# Altium PCB TAUV-Killswitch.PcbDoc
Units mil, origin at the board's own origin, x right, y up, seen from the top; angles counter-clockwise.
Board outline 1170 x 960 mil, 2 copper layers (Top Layer, Bottom Layer); 18 components, 9 nets, 41 pads, 6 vias.
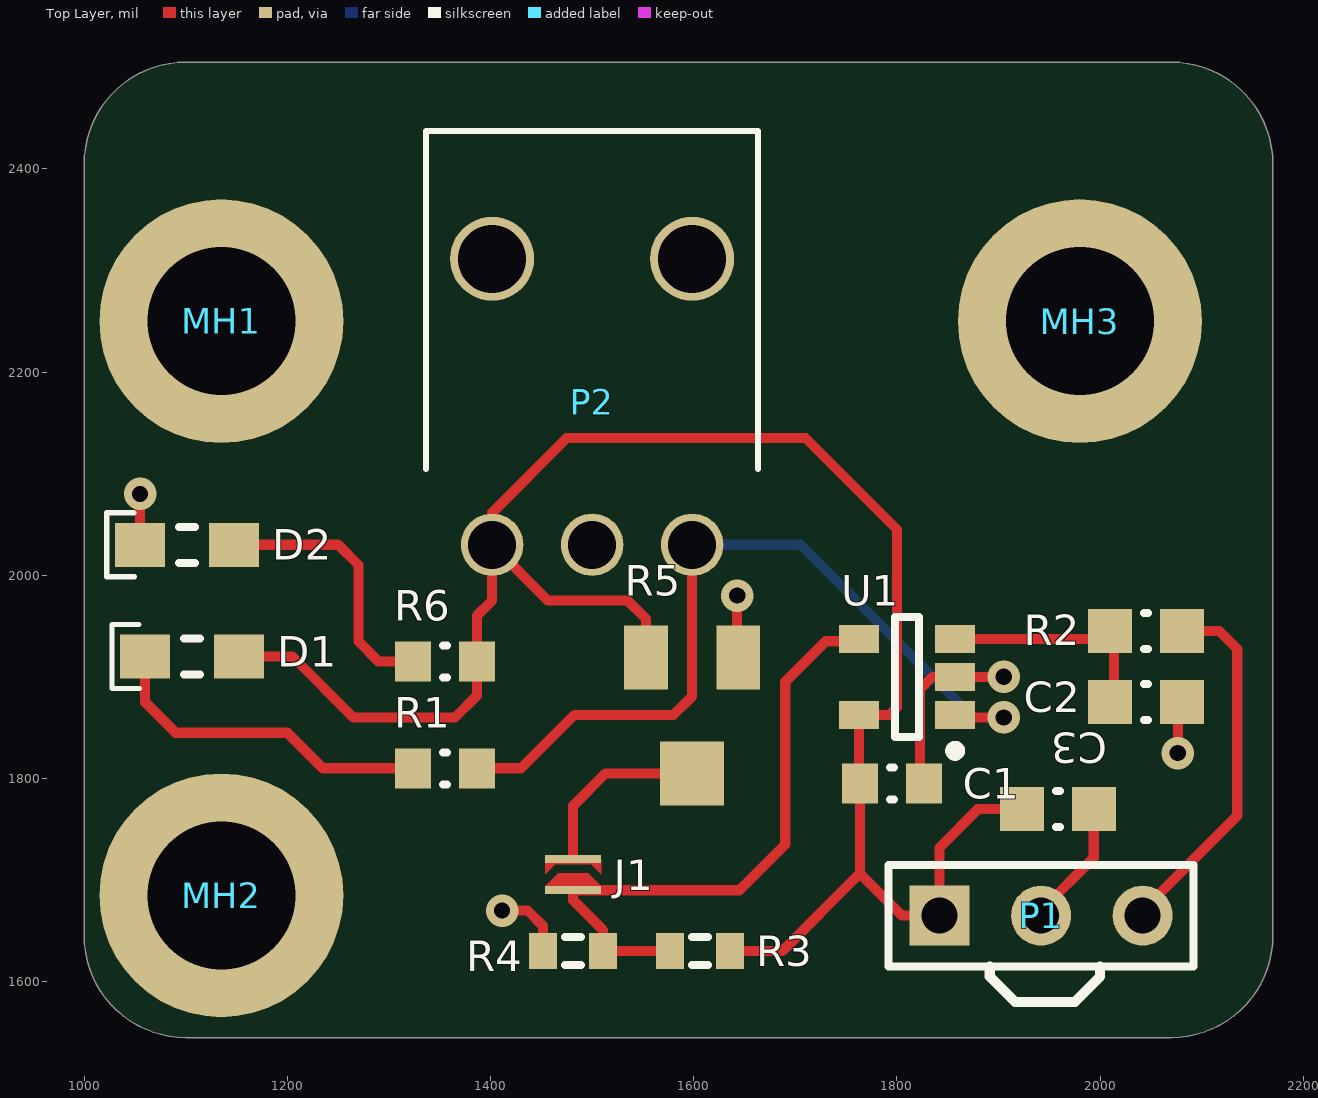
[diagram p0: Top Layer view]
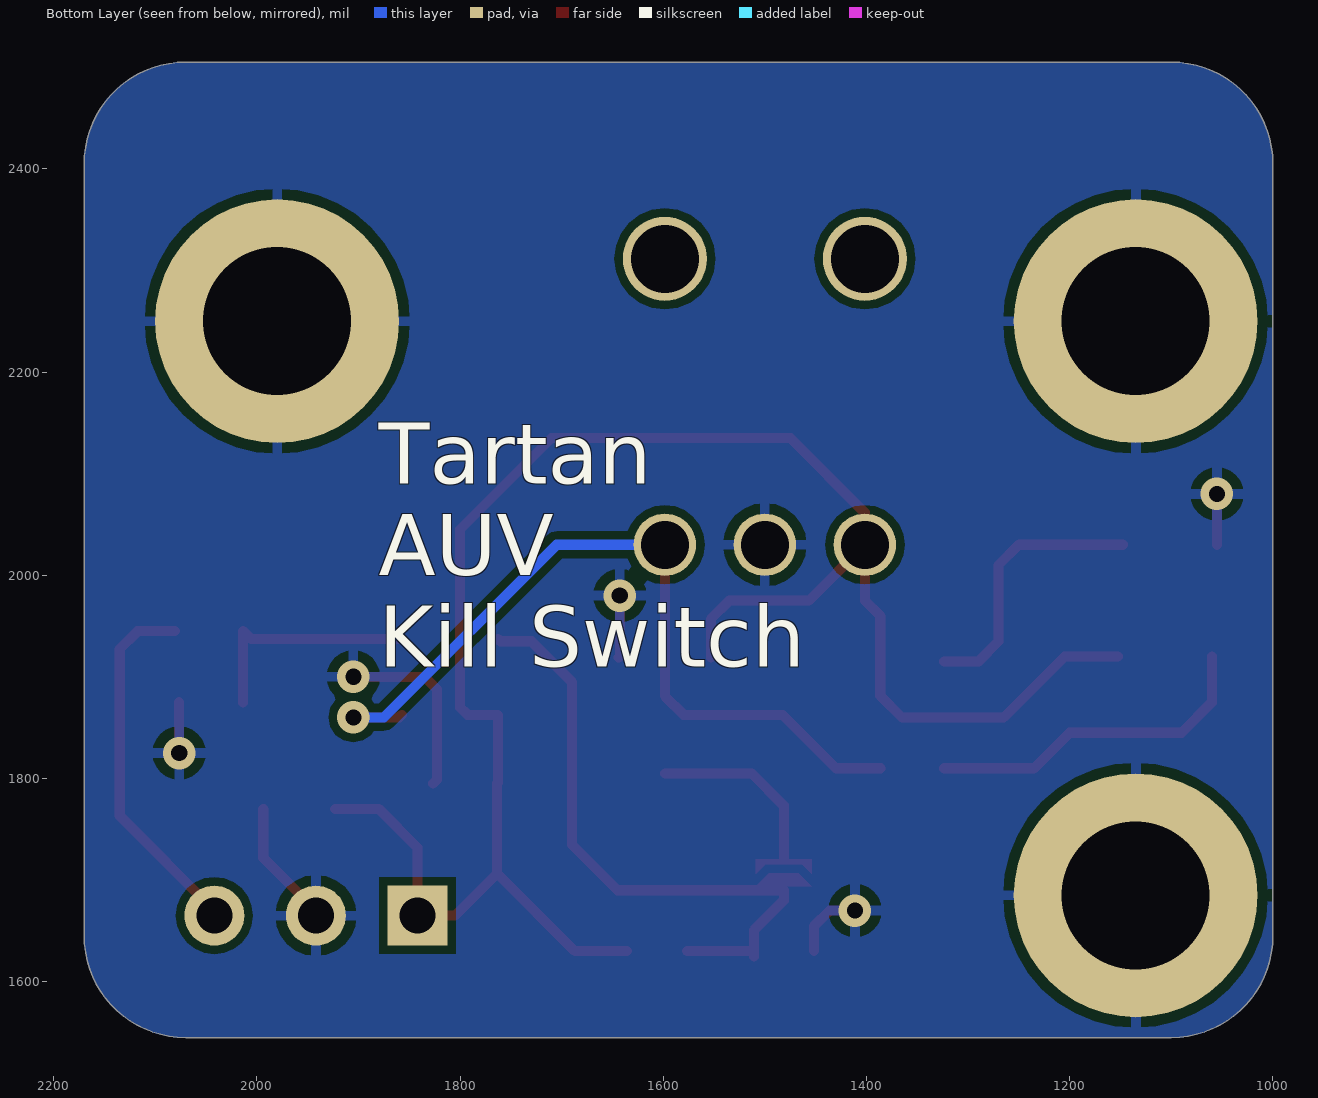
[diagram p1: Bottom Layer view, seen from below]

## Layer stack, top to bottom
Top Solder: solder mask 0.4, Solder Resist, Dk 3.5
Top Layer: signal copper 1.4
Dielectric 1: dielectric 12.6, FR-4, Dk 4.8
Bottom Layer: signal copper 1.4
Bottom Solder: solder mask 0.4, Solder Resist, Dk 3.5

## Board outline
1100,1545 2070,1545 ccw(c2070,1645) 2170,1645 2170,2405 ccw(c2070,2405) 2070,2505 1100,2505 ccw(c1100,2405) 1000,2405 1000,1645 ccw(c1100,1645)

## Design rules (kind name [scope] priority, off if disabled: settings)
Clearance [All] p1: gap=8 ignorepadtopadclearanceinfootprint=FALSE
PolygonConnect [All] p1: connectstyle=Relief reliefconductorwidth=10 reliefentries=4 polygonreliefangle="90 Angle" airgapwidth=10
RoutingVias [All] p1: holewidth=16 width=32 viastyle="Through Hole" minholewidth=16 minwidth=32 maxholewidth=28 maxwidth=50
SolderMaskExpansion [All] p1: expansion=4
Width [All] p1: maxlimit=10 minlimit=10 preferedwidth=10
30 further rules are at their usual default settings.

## Classes and differential pairs
component class U_Hall_Effect: C1 C2 D1 J1 R1 R2 R3 R4 U1
component class Main: C3 D2 MH1 MH2 MH3 P1 P2 R6

## Components (designator, comment, footprint, x,y, rotation, side; value= is the part's Value field where it differs from the comment)
C1 "100nF" CAPC0603(1608)100_N 1795,1795 r0 top
C2 "CAP 150nF 50V 0603(1608)" CAPC0603(1608)100_M 2045,1875 r180 top value=150nF
C3 "CAP 150nF 50V 0603(1608)" CAPC0603(1608)100_M 1958.31,1770 r0 top value=150nF
D1 "LED RED" LED_0805 1106.26,1920 r0 top
D2 "LED GREEN" LED_0805 1101.26,2030 r0 top
J1 "(Closed)" "Solder Jumper - Closed" 1481.3,1720.51 r270 top
MH1 "#4-40" "Mounting Hole #4-40" 1135,2250 r0 top
MH2 "#4-40" "Mounting Hole #4-40" 1135,1685 r0 top
MH3 "#4-40" "Mounting Hole #4-40" 1980,2250 r0 top
P1 "Header 3" HDR1X3 1841.85,1665 r0 top
P2 "3-Pin Molex Nano-Fit" "MOLEX NANO-FIT 1X3" 1598.43,2030 r180 top
R1 "100R" RESC0603(1608)_N 1355,1810 r0 top value="100.00 Ohm"
R2 "11K 1% 0603(1608)" RESC0603(1608)_M 2045,1945 r180 top value="11000.00 Ohm"
R3 "Res3" J1-0603 1606.31,1630 r180 top value=DNP
R4 "Res3" J1-0603 1481.31,1630 r180 top value=DNP
R5 "22AR100KLFTR" "TT BI 22A TRIM POT" 1598.43,1919.17 r180 top value=100k
R6 "100R" RESC0603(1608)_N 1355,1915 r0 top value="100.00 Ohm"
U1 "TS391SN2T1G" ONSC-TSOP-5-483-02_V 1810,1900 r180 top

## Footprints (in the part's own frame and the unit in brackets; to place one, negate y for a bottom-side part, rotate by r counter-clockwise, add the part's x,y. Pads: shape width x height; smd on the part's side, far side on the other; paste and mask are expansions set on the pad)
CAPC0603(1608)100_M [mm] "Chip Capacitor, Body 1.6x0.8mm, Height 1.0mm, IPC Low Density"
  rect 1.1x1.1 smd: 1(-0.9,0) 2(0.9,0)
  silkscreen extent -0.05,-0.45 0.05,0.45, body extent -0.87,-0.47 0.88,0.48, height 1
CAPC0603(1608)100_N [mm] "Chip Capacitor, Body 1.6x0.8mm, Height 1.0mm, IPC Medium Density"
  rect 0.9x1 smd: 1(-0.8,0) 2(0.8,0)
  silkscreen extent -0.05,-0.4 0.05,0.4, body extent -0.87,-0.48 0.88,0.47, height 1
HDR1X3 [mm] "Connector; Header; 3 Position"
  rect 1.5x1.5 hole 0.9: 1(0,0)
  round 1.5 hole 0.9: 2(2.54,0) 3(5.08,0)
  silkscreen extent -1.27,-1.27 6.35,1.27
J1-0603 [mm] "Chip Resistor, Body 1.6x0.8mm, IPC High Density"
  rect 0.7x0.9 smd: 1(-0.75,0) 2(0.75,0)
  silkscreen extent -0.2,-0.35 0.2,0.35, body extent -0.85,-0.48 0.85,0.48, height 0.9
LED_0805 [mm] "Liteon 0805 Chip LED"
  rect 1.25x1.1 smd: 1(-1.175,0) 2(1.175,0)
  silkscreen extent -2.01,-0.8 0.2,0.8, body extent -1,-0.63 1,0.63, height 0.8
"MOLEX NANO-FIT 1X3" [mm]
  round 1.56 hole 1.2: 1(0,0) 2(2.5,0) 3(5,0)
  round 2.1 hole 1.7: ""(0,-7.15) ""(5,-7.15)
  silkscreen extent -1.65,-10.35 6.65,-1.9, body extent -2.6,-26.11 10.97,0.32, height 7.56
"Mounting Hole #4-40" [mm] "Mounting Hole for ANSI #4-40 w/ Flat Washer, Loose Fit"
  round 6.1 hole 3.7: 0(0,0)
ONSC-TSOP-5-483-02_V [mm] "SOP, 5-Leads, Body 3x1.5mm, Pitch 0.95mm"
  rect 1x0.7 smd: 1(-1.2,0.95) 2(-1.2,0) 3(-1.2,-0.95) 4(1.2,-0.95) 5(1.2,0.95)
  silkscreen extent -1.33,-1.5 0.3,1.97, body extent -0.75,-1.5 0.75,1.5, height 1.1
RESC0603(1608)_M [mm] "Chip Resistor, Body 1.6x0.8mm, IPC Low Density"
  rect 1.1x1.1 smd: 1(-0.9,0) 2(0.9,0)
  silkscreen extent -0.05,-0.45 0.05,0.45, body extent -0.85,-0.47 0.85,0.47, height 0.6
RESC0603(1608)_N [mm] "Chip Resistor, Body 1.6x0.8mm, IPC Medium Density"
  rect 0.9x1 smd: 1(-0.8,0) 2(0.8,0)
  silkscreen extent -0.05,-0.4 0.05,0.4, body extent -0.85,-0.47 0.85,0.47, height 0.6
"Solder Jumper - Closed" [mm]
  rect 0.2x1.4 smd paste+0: 1(0,0) 2(0.775,0)
  Top Layer region: 0.375,-0.7 0,-0.7 0,0.7 0.375,0.7 0.125,0.45 0.125,-0.45
  Top Layer region: 0.35,0.375 0.675,0.7 0.675,-0.7 0.35,-0.375
"TT BI 22A TRIM POT" [mm] "Model 22A (22AR100KLFTR)"
  rect 1.09x1.6 smd: 1(1.155,0) 3(-1.155,0)
  rect 1.6x1.6 smd: 2(0,2.9)
  body extent -1.6,-0.38 1.6,3.13, height 2.22

## Part data
C1: library part CMP-1035-02580-1, "CAP 100nF 10V ±10% 0603 (1608 Metric) Thickness 1mm SMD", Case-EIA=0603, Case-Metric=1608, Rated Voltage="10 V", Tolerance=±10%, Max Thickness="1 mm", Technology=SMT
C2 C3: library part CMP-1035-02624-1, "CAP 150nF 50V -20% to +80% 0603 (1608 Metric) Thickness 1mm SMD", Case-EIA=0603, Case-Metric=1608, Rated Voltage="50 V", Tolerance="-20% to +80%", Max Thickness="1 mm", Technology=SMT
D1: library part LED0, "led", Color=Red, Current - Test=20mA, Lens Color=Colorless, Manufacturer="Lite-On Inc.", Manufacturer Part Number=LTST-C171KRKT, Millicandela Rating=54mcd, Package / Case="0805 (2012 Metric)", Supplier Part Number 1=160-1427-1-ND, Voltage - Forward (Vf) (Typ)=2V, Category=Optoelectronics, ComponentLink1Description=http://optoelectronics.liteon.com/upload/download/DS22-2000-109/LTST-C171KRKT.pdf, ComponentLink1URL=http://optoelectronics.liteon.com/upload/download/DS22-2000-109/LTST-C171KRKT.pdf, Features=-, Height (Max)=0.80mm, Lens Style/Size="Rectangle with Flat Top, 1.40mm x 1.25mm", Lens Transparency=Clear, Mounting Type="Surface Mount", Packaging="Cut Tape (CT)", Part Status=Active, Pricing 1="1=0.31, 10=0.225, 25=0.1656, 100=0.1183, 250=0.0804, 500=0.07096, 1000=0.05558 (USD)", RoHS="RoHS Compliant", Size / Dimension="2.00mm L x 1.25mm W", Stock 1=260544, Supplier 1=Digi-Key, Viewing Angle=130°, Wavelength - Dominant=631nm, Wavelength - Peak=639nm
D2: library part LED0, "led", Color=Green, Current - Test=20mA, Lens Color=Colorless, Manufacturer="Lite-On Inc.", Manufacturer Part Number=LTST-C171KGKT, Millicandela Rating=35mcd, Package / Case="0805 (2012 Metric)", Supplier Part Number 1=160-1426-1-ND, Voltage - Forward (Vf) (Typ)=2V, Category=Optoelectronics, ComponentLink1Description=http://optoelectronics.liteon.com/upload/download/DS22-2000-118/LTST-C171KGKT.pdf, ComponentLink1URL=http://optoelectronics.liteon.com/upload/download/DS22-2000-118/LTST-C171KGKT.pdf, Features=-, Height (Max)=0.90mm, Lens Style/Size="Rectangle with Flat Top, 1.40mm x 1.25mm", Lens Transparency=Clear, Mounting Type="Surface Mount", Packaging="Cut Tape (CT)", Part Status=Active, Pricing 1="1=0.31, 10=0.225, 25=0.1656, 100=0.1183, 250=0.0804, 500=0.07096, 1000=0.05558 (USD)", RoHS="RoHS Compliant", Size / Dimension="2.00mm L x 1.25mm W", Stock 1=350441, Supplier 1=Digi-Key, Viewing Angle=130°, Wavelength - Dominant=571nm, Wavelength - Peak=574nm
J1: library part "Jumper Closed", "Jumper"
MH1 MH2 MH3: library part "Mounting Hole #4-40, Loose Fit", "Mounting Hole for ANSI #4-40 w/ Flat Washer, Loose Fit", Datasheet=http://blogs.mentor.com/tom-hausherr/blog/tag/pcb-mounting-holes/
P1: "Header, 3-Pin", LatestRevisionDate=17-Jul-2002, LatestRevisionNote="Re-released for DXP Platform.", Publisher="Altium Limited"
P2: library part "3-Pin Nano-Fit", "NanoFit RA Hdr TH SR 3Ckt", Manufacturer=Molex, Part Number=105313-1204, Supplier Part Number=538-105313-1204, Supplier=Mouser
R1 R6: library part CMP-1012-00050-1, "100R 0.1W 5% 0603 (1608 Metric)  SMD", Case-EIA=0603, Case-Metric=1608, Power="0.1 W", Tolerance="5 %", Technology=SMT
R2: library part CMP-1012-00627-1, "11K 0.1W 1% 0603 (1608 Metric)  SMD", Case-EIA=0603, Case-Metric=1608, Power="0.1 W", Tolerance="1 %", Technology=SMT
R3 R4: "Resistor", LatestRevisionDate=29-May-2009, LatestRevisionNote="IPC-7351 Footprint Added.", PackageDescription="Chip Resistor", PackageReference=J1-0603, Published=8-Jun-2000, Publisher="Altium Limited"
R5: library part "TT 22AR Trim Pot", "TT Electronics BI 22AR100KLFTR SMT trim pot, 100k 20%", Supplier Part Number 1=987-1003-1-ND, Tolerance=20%, Datasheet=http://www.bitechnologies.com/pdfs/22.pdf, Supplier 1=Digi-Key
U1: library part CMP-1305-00060-1, "Low Power Single Voltage Comparator, 2 to 36 V, -40 to 125 degC, 5-Pin TSOP, Pb-Free, Tape and Reel", Manufacturer="On Semiconductor", ComponentLink1Description="Manufacturer URL", ComponentLink1URL=http://www.onsemi.com/, ComponentLink2Description=Datasheet, ComponentLink2URL=http://www.onsemi.com/pub_link/Collateral/TS391-D.PDF, ComponentLink3Description="Package Specification", ComponentLink3URL=http://www.onsemi.com/pub_link/Collateral/483.PDF, DatasheetVersion="Rev. 3", ICC Typ (mA)=0.5, IO Typ (mA)=16, Mounting Technology="Surface Mount", PackageDescription="5-Pin Small Outline Package, Body 3 x 1.5 mm, Pitch 0.95 mm", PackageReference=TSOP-5-483-02, PackageVersion="Rev. K, 04/2013", Packing="Tape and Reel", PartNumber=TS391SN2T1G, RoHS=TRUE, VCC Max (V)=36, VCC Min (V)=2

## Via types
v1: diameter 32, hole 16, Top Layer to Bottom Layer, 6 vias

## Nets (pads, with @x,y where several pads share a name; then routed paths per layer and width w, separated by ;. In a path a pad name is that pad's centre, name@x,y a point inside that pad or via, vN(x,y) a via of type N, cw(c..) or ccw(c..) an arc to the next point about the centre after c; other vN are vias at no path point)
ESTOP_N: P2.1 R1.2 U1.1 | length 816.1
  Top Layer w10: R1.2 1430,1810 1482.6,1862.6 1580,1862.6 1598.43,1881.02 P2.1 ; U1.1 1859.84,1860 v1(1905,1860)
  Bottom Layer w10: P2.1 1705,2030 1875,1860 v1(1905,1860)
GND: C1.2 C2.1 C3.2 D2.1 MH1.0 MH2.0 MH3.0 P1.2 P2.2 R4.2 R5.3 U1.2 | length 536
  Top Layer w10: D2.1 v1(1055,2080) ; v1(1411.31,1670) 1436.31,1670 1451.78,1654.53 R4.2 ; v1(1642.71,1980) 1642.71,1920.36 R5.3 ; C1.2 1822.56,1798.94 1822.56,1887.56 1835,1900 U1.2 v1(1905,1900) ; P1.2@1941.85,1670 1993.75,1721.9 C3.2 ; v1(2076.5,1825) C2.1@2076.5,1875
HALL_SIG: P1.3 R2.1 | length 357.8
  Top Layer w10: P1.3@2041.85,1670 2135,1763.15 2135,1927.4 2117.4,1945 R2.1
NetC2_2: C2.2 R2.2 U1.3 | length 229.4
  Top Layer w10: U1.3 2005.91,1937.4 2013.5,1945 C2.2@2013.5,1875
NetD1_1: D1.1 R1.1 | length 335.4
  Top Layer w10: D1.1 1060,1875 1090,1845 1200,1845 1235,1810 R1.1
NetD2_2: D2.2 R6.1 | length 267.6
  Top Layer w10: D2.2 1250,2030 1270,2010 1270,1935 1290,1915 R6.1
NetJ1_1: J1.1 R5.2 | length 182.9
  Top Layer w10: J1.1 1481.3,1773.11 1513.19,1805 R5.2
NetJ1_2: J1.2 R3.2 R4.1 U1.4 | length 620.8
  Top Layer w10: R4.1@1510.83,1625 R4.1 ; R3.2 R4.1 ; U1.4 1760.35,1935 1730,1935 1690,1895 1690,1735 1645,1690 J1.2 1481.31,1680 1510.83,1650.47 R4.1
VCC_3V3: C1.1 C3.1 D1.2 P1.1 P2.3 R3.1 R5.1 R6.2 U1.5 | length 1929.9
  Top Layer w10: D1.2 1205,1920 1265,1860 1365,1860 1386.5,1881.5 R6.2 1386.5,1960 1401.57,1975.08 P2.3 ; R5.1 1552.95,1957.05 1535,1975 1456.57,1975 P2.3 ; R3.1 1687.01,1630 1763.5,1706.5 ; C3.1 1880,1770 1841.85,1731.85 P1.1 1805,1665 1763.5,1706.5 ; P2.3 1401.57,2061.57 1475,2135 1710,2135 1800,2045 1800,1870 1792.6,1862.6 U1.5 1762.76,1795.75 C1.1 1763.5,1706.5
pads on no net: P2.

## Polygon pours and split planes (outlines as drawn)
GND on Bottom Layer "Bottom Layer-GND" (solid, pour order 0): 1000,2405 1000,1645 ccw(c1100,1645) 1100,1545 2070,1545 ccw(c2070,1645) 2170,1645 2170,2405 ccw(c2070,2405) 2070,2505 1100,2505 ccw(c1100,2405)

## Silkscreen, mask and mechanical layers (free items; w line width, h text height)
Top Overlay:
  lines w10: 1891.34,1615 1891.34,1605 1916.34,1580 1975,1580 2000,1605 2000,1615
Bottom Overlay:
  text "Tartan / AUV / Kill Switch" at 1880,1910 h60
Mechanical 1:
  the board outline again, w5